# Altium PCB zigbee.PcbDoc
Units mm, origin at the board's own origin, x right, y up, seen from the top; angles counter-clockwise.
Board outline 29.84 x 46.23 mm, 2 copper layers (Top Layer, Bottom Layer); 60 components, 48 nets, 213 pads, 77 vias.
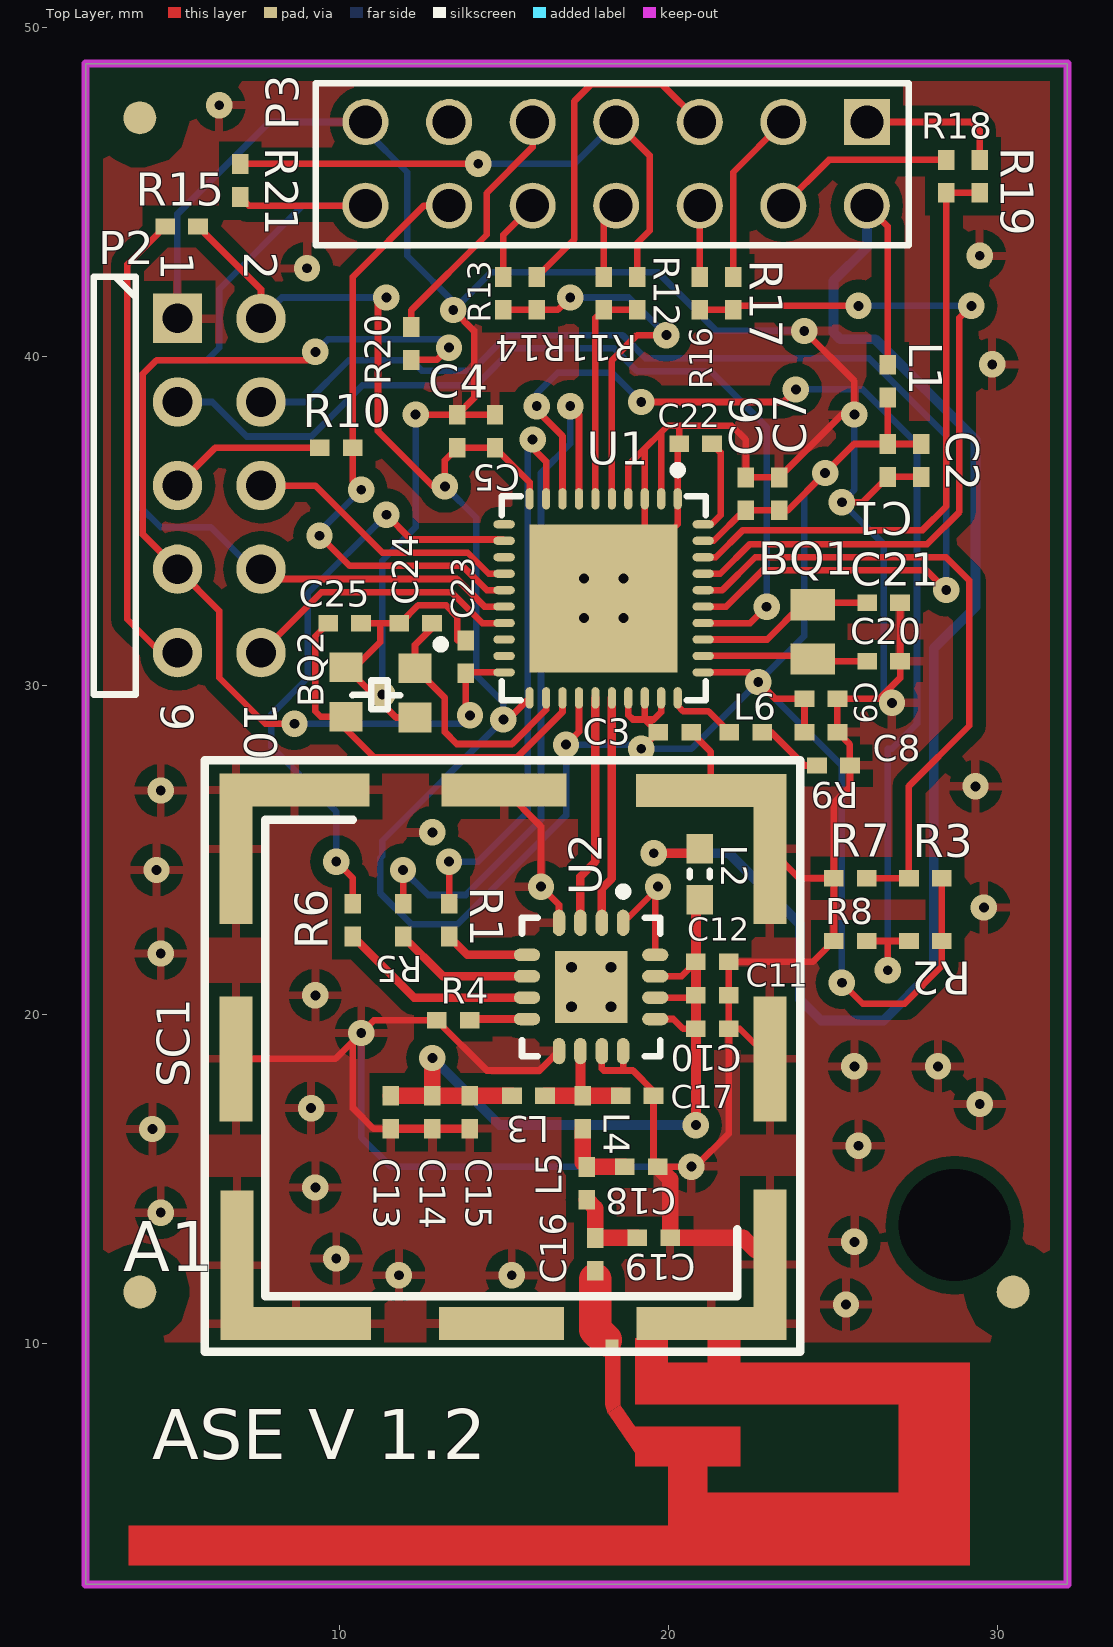
[diagram p0: Top Layer view]
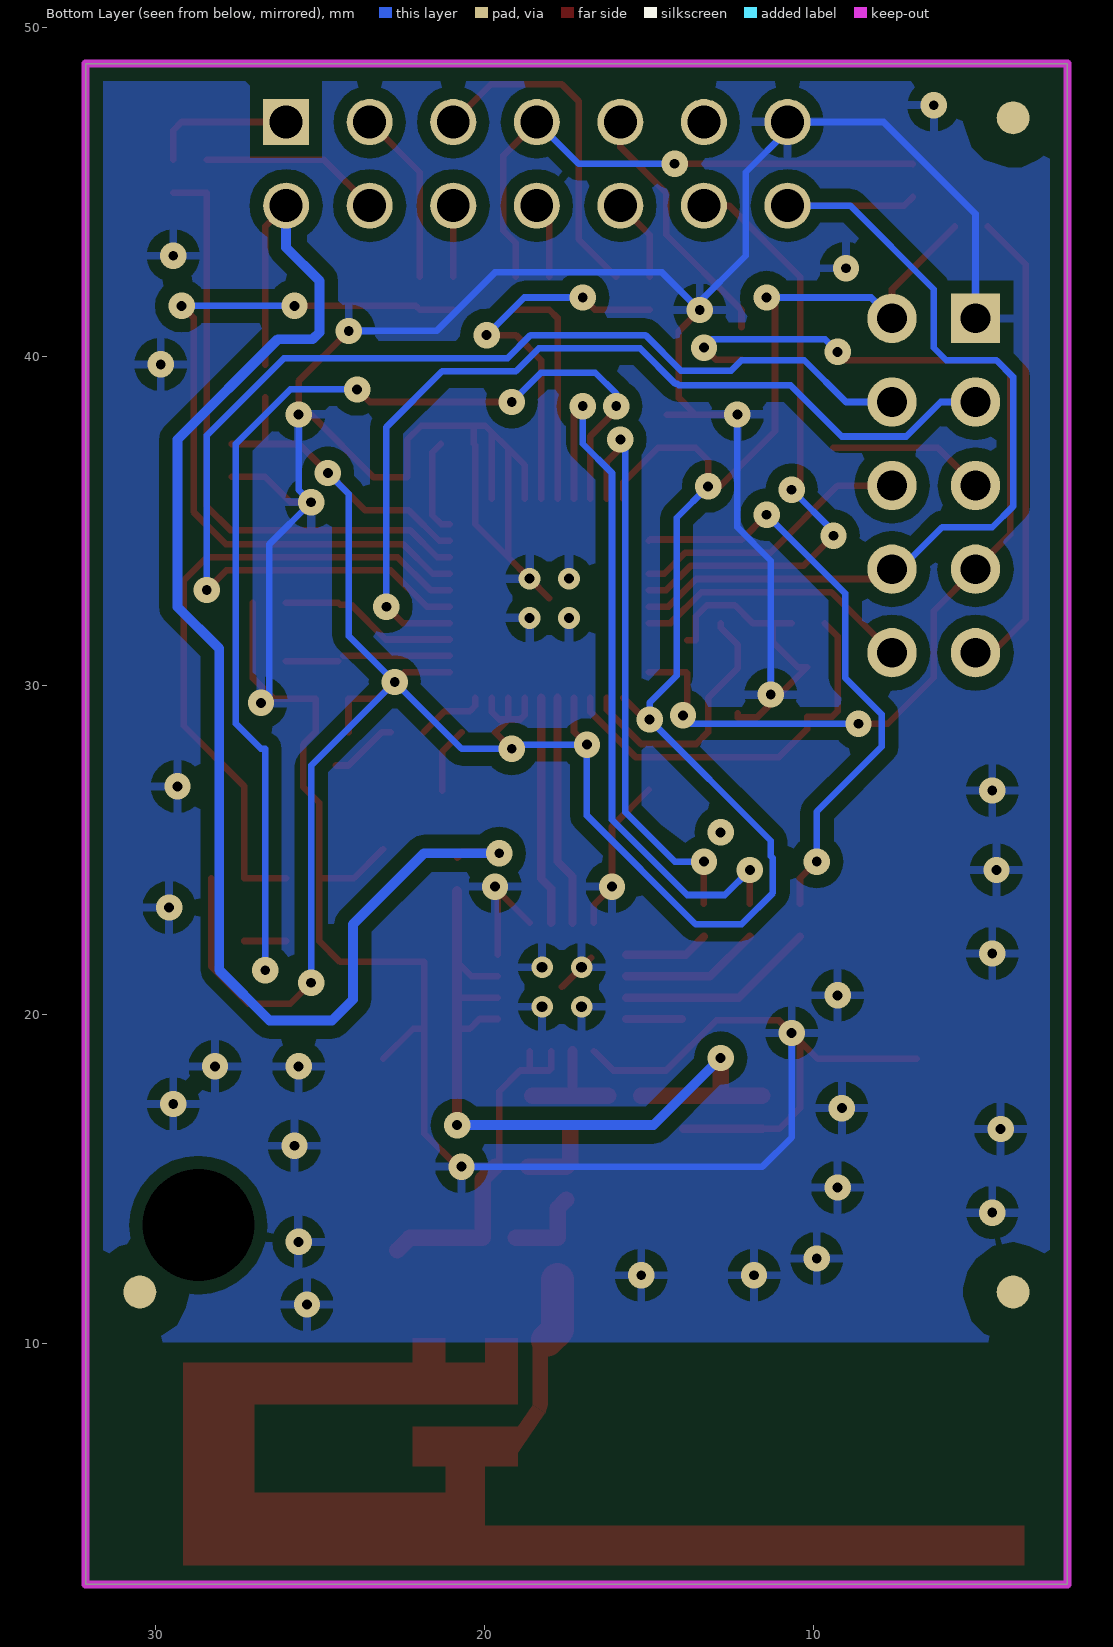
[diagram p1: Bottom Layer view, seen from below]

## Layer stack, top to bottom
Top Layer: signal copper 0.0356
Dielectric: dielectric 0.32, FR-4, Dk 4.8
Bottom Layer: signal copper 0.0356

## Board outline
2.286,2.667 32.131,2.667 32.131,48.895 2.286,48.895

## Design rules (kind name [scope] priority, off if disabled: settings)
Clearance Clearance_1 [InPolygon] p1: gap=0.4
Clearance [All] p2: gap=0.2
PolygonConnect [All] p1: connectstyle=Relief reliefconductorwidth=0.254 reliefentries=4 polygonreliefangle="90 Angle"
RoutingVias [All] p1: holewidth=0.711 width=1.27 viastyle="Through Hole" minholewidth=0.711 minwidth=1.27 maxholewidth=0.711 maxwidth=1.27
SilkscreenOverComponentPads [All] p1: minsilkscreentomaskgap=0.254
SolderMaskExpansion [All] p1: expansion=0
Width [All] p1: maxlimit=0.5 minlimit=0.15 preferedwidth=0.254
27 further rules are at their usual default settings.

## Components (designator, comment, footprint, x,y, rotation, side; value= is the part's Value field where it differs from the comment)
A1 "ANT" "F ant" 18.542,10.16 r180 top
BQ1 "Crystal" FC-12M 24.384,31.623 r90 top
BQ2 "Crystal" 403C11A32M00000 11.176,29.718 r180 top
C1 "Capacitor" 0402 26.67,36.83 r270 top
C2 "Capacitor" 0402 27.686,36.83 r270 top
C3 "Capacitor" 0402 20.193,28.575 r0 top
C4 "Capacitor" 0402 13.589,37.719 r90 top
C5 "Capacitor" 0402 14.732,37.719 r90 top
C6 "Capacitor" 0402 22.352,35.814 r90 top
C7 "Capacitor" 0402 23.368,35.814 r90 top
C8 "Capacitor" 0402 24.638,28.575 r0 top
C9 "Capacitor" 0402 24.638,29.591 r0 top
C10 "Capacitor" 0402 21.336,19.558 r0 top
C11 "Capacitor" 0402 21.336,20.574 r180 top
C12 "Capacitor" 0402 21.336,21.59 r180 top
C13 "Capacitor" 0402 11.557,17.018 r90 top
C14 "Capacitor" 0402 12.827,17.018 r90 top
C15 "Capacitor" 0402 13.97,17.018 r90 top
C16 "Capacitor" 0402 17.78,12.7 r270 top
C17 "Capacitor" 0402 19.05,17.526 r180 top
C18 "Capacitor" 0402 19.177,15.367 r180 top
C19 "Capacitor" 0402 19.558,13.208 r180 top
C20 "Capacitor" 0402 26.543,30.734 r180 top
C21 "Capacitor" 0402 26.543,32.512 r180 top
C22 "Capacitor" 0402 20.828,37.338 r180 top
C23 "Capacitor" 0402 13.843,30.861 r90 top
C24 "Capacitor" 0402 12.319,31.877 r0 top
C25 "Capacitor" 0402 10.16,31.877 r180 top
L1 "Inductor" 0402 26.67,39.243 r270 top
L2 "Inductor" 0603 20.955,24.257 r270 top
L3 "Inductor" 0402 15.748,17.526 r180 top
L4 "Inductor" 0402 17.399,17.018 r270 top
L5 "Inductor" 0402 17.526,14.859 r270 top
L6 "Inductor" 0402 22.352,28.575 r180 top
P2 "*" HDR2X5H 5.08,41.148 r270 top
P3 "Header 7X2" DIP14 26.035,47.117 r270 top
R1 "Resistor" 0402 13.335,22.86 r270 top
R2 "Resistor" 0402 27.813,22.225 r180 top
R3 "Resistor" 0402 27.813,24.13 r180 top
R4 "Resistor" 0402 13.462,19.812 r0 top
R5 "Resistor" 0402 11.938,22.86 r270 top
R6 "Resistor" 0402 10.414,22.86 r270 top
R7 "Resistor" 0402 25.527,24.13 r180 top
R8 "Resistor" 0402 25.527,22.225 r180 top
R9 "Resistor" 0402 25.019,27.559 r0 top
R10 "Blob" 0402 9.906,37.211 r0 top
R11 "Blob" 0402 18.034,41.91 r90 top
R12 "Blob" 0402 19.05,41.91 r270 top
R13 "Blob" 0402 14.986,41.91 r90 top
R14 "Blob" 0402 16.002,41.91 r270 top
R15 "Blob" 0402 5.207,43.942 r0 top
R16 "Blob" 0402 20.955,41.91 r90 top
R17 "Blob" 0402 21.971,41.91 r270 top
R18 "Blob" 0402 28.448,45.466 r90 top
R19 "Blob" 0402 29.464,45.466 r270 top
R20 "Resistor" 0402 12.192,40.386 r90 top
R21 "Blob" 0402 6.985,45.339 r270 top
SC1 "BMI-S-202-F" BMIS_202_F 14.986,18.669 r0 top
U1 "CC2530F256" QFN40 18.034,32.639 r270 top
U2 "CC2592" QFN16 17.653,20.828 r270 top

## Footprints (in the part's own frame and the unit in brackets; to place one, negate y for a bottom-side part, rotate by r counter-clockwise, add the part's x,y. Pads: shape width x height; smd on the part's side, far side on the other; paste and mask are expansions set on the pad)
0402 [mm] "Chip Capacitor, Body 1.0x0.5mm, IPC High Density"
  rect 0.6x0.5 smd: 1(-0.5,0) 2(0.5,0)
  body extent -0.55,-0.3 0.55,0.3, height 1.3
403C11A32M00000 [mm] "CRYSTAL 32MHZ 10PF SMD"
  rect 1x0.9 smd: 1(-1.125,-0.8) 2(0.975,-0.825) 3(0.975,0.675) 4(-1.125,0.7)
  silkscreen extent -2.03,-1.65 0.77,0.45, body extent -1.7,-1.22 1.53,1.15, height 0.85
0603 [mm] "0603, 2-Leads, Body 1,6x0,8mm, IPC High Density"
  rect 0.9x0.8 smd: 1(-0.775,0) 2(0.775,0)
  silkscreen extent -0.1,-0.3 0.1,0.3, body extent -0.8,-0.4 0.8,0.4, height 0.5
BMIS_202_F [mm] "BOARD SHIELD .65X.65\" FRAME"
  rect 1x4.55 smd: 1(-8.125,6.35) 3(8.1,6.35) 5(8.1,-6.275) 7(-8.1,-6.3)
  rect 4.55x1 smd: 1(-6.35,8.15) 3(6.3,8.125) 5(6.325,-8.075) 7(-6.3,-8.075)
  rect 3.8x1 smd: 2(0.025,8.15) 6(-0.05,-8.075)
  rect 1x3.8 smd: 4(8.1,-0.025) 8(-8.125,-0.025)
  silkscreen extent -9.08,-8.93 9.03,9.05, body extent -8.25,-8.25 8.25,8.25, height 3.8
DIP14 [mm]
  rect 1.4x1.4 hole 1: 1(0,0)
  round 1.4 hole 1: 2(2.54,0) 3(0,-2.54) 4(2.54,-2.54) 5(0,-5.08) 6(2.54,-5.08) 7(0,-7.62) 8(2.54,-7.62) 9(0,-10.16) 10(2.54,-10.16) 11(0,-12.7) 12(2.54,-12.7) 13(0,-15.24) 14(2.54,-15.24)
  silkscreen extent -1.17,-16.75 3.75,1.27, body extent -0.74,-16.35 3.25,1, height 8.64
"F ant" [mm] "F antenna 2.4Ghz"
  rect 0.4x0.4 smd paste+0: 1(0.254,0.254)
  rect 3x0.01 smd: 2(-2.032,0)
  Top Layer region: 0,2.03 0.379,2.291 -0.577,3.681 -0.956,3.421
  Top Layer region: 0,0 0.46,0 0.46,2.03 0,2.03
  Top Layer region: -3.65,0.74 -0.45,0.74 -0.45,2.03 -3.65,2.03
  Top Layer region: -3.65,2.69 -0.45,2.69 -0.45,3.9 -3.65,3.9
  Top Layer region: -10.63,0.74 -8.45,0.74 -8.45,4.7 -10.63,4.7
  Top Layer region: -10.63,5.7 14.95,5.7 14.95,6.91 -10.63,6.91
  Top Layer region: -10.63,4.7 -1.45,4.7 -1.45,5.7 -10.63,5.7
  Top Layer region: -8.45,0.74 -3.575,0.74 -3.575,2.03 -8.45,2.03
  Top Layer region: -2.65,3.9 -1.45,3.9 -1.45,4.7 -2.65,4.7
  Top Layer region: -1.45,0 -0.45,0 -0.45,0.74 -1.45,0.74
  Top Layer region: -3.65,0 -2.65,0 -2.65,0.74 -3.65,0.74
  Top Layer region: 0,2.03 0.46,2.03 0.379,2.291
FC-12M [mm]
  rect 0.95x1.35 smd: 1(-0.825,0) 2(0.825,0)
  body extent -1.02,-0.6 1.02,0.6, height 0.6
HDR2X5H [mm] "Connector; Header; 5x2 Position; Right Angle"
  rect 1.5x1.5 hole 0.9: 1(0,0)
  round 1.5 hole 0.9: 2(0,2.54) 3(2.54,0) 4(2.54,2.54) 5(5.08,0) 6(5.08,2.54) 7(7.62,0) 8(7.62,2.54) 9(10.16,0) 10(10.16,2.54)
  silkscreen extent -1.27,-2.54 11.43,-1.27
QFN16 [mm]
  oval 0.8x0.38 smd: 1(-1.95,0.975) 2(-1.95,0.325) 3(-1.95,-0.325) 4(-1.95,-0.975) 9(1.95,-0.975) 10(1.95,-0.325) 11(1.95,0.325) 12(1.95,0.975)
  oval 0.38x0.8 smd: 5(-0.975,-1.95) 6(-0.325,-1.95) 7(0.325,-1.95) 8(0.975,-1.95) 13(0.975,1.95) 14(0.325,1.95) 15(-0.325,1.95) 16(-0.975,1.95)
  rect 2.2x2.2 smd: 17(0,0)
  silkscreen extent -3.02,-2.1 2.1,2.1, body extent -2.08,-2.07 2.07,2.08, height 0.8
QFN40 [mm]
  oval 0.65x0.25 smd: 1(-3.025,2.25) 2(-3.025,1.75) 3(-3.025,1.25) 4(-3.025,0.75) 5(-3.025,0.25) 6(-3.025,-0.25) 7(-3.025,-0.75) 8(-3.025,-1.25) 9(-3.025,-1.75) 10(-3.025,-2.25) 21(3.025,-2.25) 22(3.025,-1.75) 23(3.025,-1.25) 24(3.025,-0.75) 25(3.025,-0.25) 26(3.025,0.25) 27(3.025,0.75) 28(3.025,1.25) 29(3.025,1.75) 30(3.025,2.25)
  oval 0.25x0.65 smd: 11(-2.25,-3.025) 12(-1.75,-3.025) 13(-1.25,-3.025) 14(-0.75,-3.025) 15(-0.25,-3.025) 16(0.25,-3.025) 17(0.75,-3.025) 18(1.25,-3.025) 19(1.75,-3.025) 20(2.25,-3.025) 31(2.25,3.025) 32(1.75,3.025) 33(1.25,3.025) 34(0.75,3.025) 35(0.25,3.025) 36(-0.25,3.025) 37(-0.75,3.025) 38(-1.25,3.025) 39(-1.75,3.025) 40(-2.25,3.025)
  rect 4.5x4.5 smd: 41(0,0)
  silkscreen extent -4.02,-3.1 3.1,3.1, body extent -3.08,-3.08 3.08,3.08, height 1

## Part data
A1: "Inverted-F Antenna"
BQ1: library part 6LC:308C, "CRYSTAL 32.768KHZ 12.5PF SMD"
BQ2: library part HC-49SMD, "CRYSTAL 32MHZ 10PF SMD"
C1 C10: library part Cap, "CAP CER 2.2UF 6.3V 20% X5R 0402"
C2 C13 C22: library part Cap, "CAP CER 1UF 6.3V 10% X5R 0402"
C3 C4 C5 C6 C7 C8 C9 C23: library part Cap, "CAP CER 0.1UF 10V 20% X5R 0402"
C11 C14: library part Cap, "CAP CER 10000PF 10V 10% X5R 0402"
C12 C15: library part Cap, "CAP CER 12PF 50V 5% NP0 0402"
C16: library part Cap, "CAP CER 18PF 50V 5% NP0 0402"
C17 C18: library part Cap, "CAP CER 2.2PF 50V NP0 0402"
C19: library part Cap, "CAP CER 0.2PF 50V NP0 0402"
C20 C21: library part Cap, "CAP CER 22PF 50V 5% NP0 0402"
C24 C25: library part Cap, "CAP CER 15PF 50V 5% NP0 0402"
L1: "FILTER CHIP 1000 OHM 250MA 0402"
L2: "FILTER CHIP 1000 OHM 250MA 0603"
L3: "INDUCTOR 4.7NH 300MA 0402"
L4: "INDUCTOR 1.0NH 300MA 0402"
L5: "INDUCTOR 2.0NH 300MA 0402"
L6: "INDUCTOR 6.8NH 300MA 0402"
P2: library part "Header 5X2", "CONN HEADER R/A DUAL 10POS GOLD"
P3: "BERGSTIK II .100\" DR STRAIGHT"
R1 R2 R3 R5 R6 R7 R8: library part Res3, "RES 10K OHM 1/10W 5% 0402 SMD"
R4: library part Res3, "RES 3.9K OHM 1/10W 1% 0402 SMD"
R9: library part Res3, "RES 56K OHM 1/10W 1% 0402 SMD"
R10 R11 R12 R13 R14 R15 R16 R17 R18 R19 R21: library part Res3, "RES 0.0 OHM 1/10W JUMP 0402 SMD"
R20: library part Res3, "RES 2.7K OHM 1/10W 5% 0402 SMD"
SC1: "BOARD SHIELD .65X.65\" FRAME"
U1: "IC SOC IEEE 802.15.4/ZIG 40VQFN"
U2: "IC RF FRONT END 2.4GHZ 16-VQFN"

## Free pads (board coordinates)
  round 1 smd mask+1: 1(3.937,11.557) 1(3.937,47.244) 1(30.48,11.557)
  round 1 smd far side mask+1: 1(3.937,11.557) 1(3.937,47.244) 1(30.48,11.557)
  round 1.524 hole 3.4: 12(28.702,13.589)

## Via types
v1: diameter 0.8, hole 0.3, Top Layer to Bottom Layer, 69 vias
v2: diameter 0.66, hole 0.33, Top Layer to Bottom Layer, tented top, 4 vias
v3: diameter 0.66, hole 0.3, Top Layer to Bottom Layer, tented top, 4 vias

## Nets (pads, with @x,y where several pads share a name; then routed paths per layer and width w, separated by ;. In a path a pad name is that pad's centre, name@x,y a point inside that pad or via, vN(x,y) a via of type N, cw(c..) or ccw(c..) an arc to the next point about the centre after c; other vN are vias at no path point)
CC2530_CLK: P2.6 U1.14 | length 8.5
  Top Layer w0.2: P2.6 9.271,36.068 11.312,34.027 13.906,34.027 14.544,33.389 U1.14
CC2530_DC: P2.3 U1.34 | length 28
  Top Layer w0.2: U1.34 22.491,31.889 v1(22.987,32.385)
  Bottom Layer w0.2: P2.3 6.135,38.608 7.185,37.558 9.144,37.558 10.702,39.116 14.097,39.116 14.14,39.159 14.198,39.159 15.279,40.24 18.35,40.24 19.05,39.54 21.293,39.54 22.987,37.846 v1(22.987,32.385)
CC2530_DD: P2.4 U1.35 | length 36
  Top Layer w0.2: U1.35 21.759,32.389 22.86,33.49 27.851,33.49 v1(28.448,32.893)
  Bottom Layer w0.2: P2.4 9.017,38.608 10.287,39.878 12.192,39.878 12.511,39.559 14.032,39.559 15.113,40.64 18.604,40.64 19.304,39.94 26.1,39.94 28.448,37.592 v1(28.448,32.893)
CC2530_MISO: P2.10 U1.17 | length 8.5
  Top Layer w0.2: P2.10 9.459,32.827 13.409,32.827 14.347,31.889 U1.17
CC2530_MOSI: P2.8 P3.14 R21.2 U1.16 | length 30.2
  Top Layer w0.2: R21.2 7.247,44.577 P3.14 ; P2.8 7.921,33.227 13.575,33.227 14.413,32.389 U1.16
  Bottom Layer w0.2: P2.8 7.366,33.528 6.096,34.798 4.572,34.798 3.937,35.433 3.937,39.37 4.445,39.878 5.969,39.878 6.35,40.259 6.35,42.037 8.89,44.577 P3.14
CC2530_RESET: C23.1 P2.7 R20.1 U1.20 | length 32.1
  Top Layer w0.2: v1(8.636,28.829) 7.747,28.829 6.35,30.226 6.35,32.258 P2.7 4.03,34.578 4.03,39.463 4.445,39.878 9.017,39.878 v1(9.271,40.132) ; R20.1 12.962,39.886 v1(13.335,40.259) ; C23.1 13.843,29.21 v1(13.97,29.083) ; C23.1@13.871,30.389 U1.20
  Bottom Layer w0.2: v1(8.636,28.829) 13.716,28.829 v1(13.97,29.083) ; v1(9.271,40.132) 9.652,40.513 13.081,40.513 v1(13.335,40.259)
CC2530_SS: P3.12 R10.2 U1.15 | length 18.6
  Top Layer w0.2: v1(9.398,34.544) 10.315,33.627 13.74,33.627 14.478,32.889 U1.15 ; v1(10.668,35.941) 10.406,36.203 R10.2 10.406,42.41 12.573,44.577 P3.12
  Bottom Layer w0.2: v1(9.398,34.544) 9.398,34.671 v1(10.668,35.941)
CFG0: R2.2 R8.1 U1.8 | length 34.9
  Top Layer w0.2: v1@16.129,38.227 16.784,37.572 U1.8 ; v1(19.177,38.608) 23.495,38.608 v1(23.876,38.989) ; R8.1 26.67,22.225 ; v1(26.67,21.336) 26.67,22.225 ; R2.2 26.67,22.225
  Bottom Layer w0.2: v1(16.002,38.481) 16.002,38.862 16.637,39.497 18.288,39.497 v1(19.177,38.608) ; v1(23.876,38.989) 25.908,38.989 27.559,37.338 27.559,28.829 26.797,28.067 26.67,28.067 v1(26.67,21.336)
CFG1: R3.2 R7.1 U1.36 | length 19.9
  Top Layer w0.2: U1.36 21.644,32.889 22.645,33.89 28.441,33.89 29.148,33.183 29.148,28.767 27.313,26.932 R3.2 R7.1
CTS: P3.8 R11.2 | length 2.3
  Top Layer w0.2: R11.2 18.034,44.196 P3.8
GND: A1.2 BQ2.2 BQ2.4 C1.2 C2.2 C3.2 C4.2 C5.2 C6.2 C7.2 C8.2 C9.2 C10.2 C11.1 C12.1 C13.1 C14.1 C15.1 C17.1 C18.1 C19.1 C20.1 C21.1 C22.2 C23.2 C24.1 C25.1 P2.1 P3.13 R4.1 R7.2 R8.2 R9.2 SC1.1 SC1.2 SC1.3 SC1.4 SC1.5 SC1.6 SC1.7 SC1.8 U1.1 U1.2 U1.3 U1.4 U1.41 U2.1 U2.4 U2.9 U2.11 U2.12 U2.16 U2.17 | length 172
  Top Layer w0.2: SC1.8 9.881,18.644 v1@10.414,19.177 ; C25.1 11.239,31.877 ; C13.1 11.041,16.518 10.414,17.145 v1@10.414,19.177 ; BQ2.4@12.301,29.144 BQ2.4 11.726,29.018 BQ2.2 10.477,30.543 11.239,31.305 11.239,31.877 ; v1(12.319,38.227) 12.065,38.227 12.073,38.219 C4.2 ; v1(13.462,41.402) 14.097,40.767 14.097,38.727 C4.2 ; C23.2 13.581,31.361 13.581,32.089 13.243,32.427 12.395,32.427 11.845,31.877 C24.1 11.239,31.877 ; 14.47,38.219 C4.2 ; SC1.2 16.129,25.701 v1(16.129,23.876) 16.678,23.327 U2.4 ; U2.9 16.088,18.288 14.486,18.288 R4.1 11.049,19.812 v1(10.668,19.431) v1@10.414,19.177 ; U2.17@16.764,21.717 U2.17 ; U2.11 17.978,18.344 18.034,18.288 18.923,18.288 19.55,17.661 C17.1 19.55,15.494 C18.1 v1(20.701,15.367) 20.828,15.367 21.836,16.375 C10.2 ; 18.628,18.329 U2.12 ; U2.1 v1@19.603,23.753 ; U1.4 18.784,36.691 19.284,37.191 ; U2.16 v1@19.603,23.753 ; v1(19.685,23.876) 19.685,23.835 v1@19.603,23.753 ; U1.2 19.784,37.691 ; C22.2@20.284,37.294 U1.1 20.284,34.889 U1.41@19.284,33.889 ; C22.2 20.328,37.88 ; C3.2 21.286,27.982 SC1.3@21.286,26.794 ; SC1.4 22.172,19.558 C10.2 ; SC1.3@23.086,25.019 23.975,24.13 R7.2 ; v1(24.13,40.767) 25.654,39.243 v1(25.654,38.227) 25.281,38.227 C7.2 C6.2 22.352,37.465 21.929,37.888 19.981,37.888 19.784,37.691 ; v1(25.273,35.56) 25.9,35.56 C1.2 C2.2 ; C21.1 C20.1 27.043,30.218 26.416,29.591 C9.2 C8.2 25.519,28.194 R9.2 25.519,26.916 25.027,26.424 R7.2 ; U1.41@19.284,33.889 U1.3 19.284,37.191 ; U1.41@19.284,33.889 U1.41 v3(18.634,33.239) U1.41@19.284,33.889 ; 19.284,37.191 19.784,37.691 ; C10.2 C12.1 24.392,21.59 R8.2 R7.2
  Top Layer w0.254: C13.1 C14.1 C15.1
  Top Layer w0.5: C18.1 20.058,14.986 C19.1 22.272,13.208 SC1.5@22.653,12.827
  Bottom Layer w0.2: P2.1 5.08,44.323 7.874,47.117 P3.13 10.795,46.863 12.065,45.593 12.065,43.053 v1@13.589,41.529 ; v1(10.668,19.431) 10.668,16.256 11.557,15.367 v1(20.701,15.367) ; v1(11.303,29.718) 11.303,33.782 12.319,34.798 v1(12.319,38.227) ; v1(13.462,41.402) v1@13.589,41.529 ; v1(24.13,40.767) 21.463,40.767 19.685,42.545 14.605,42.545 v1@13.589,41.529 ; v1(25.654,38.227) 25.654,35.941 v1(25.273,35.56) 26.543,34.29 26.543,29.718 v1(26.797,29.464)
  other v1: 25.4,11.176 11.811,12.065 15.24,12.065 9.906,12.573 25.654,13.081 4.572,13.97 9.271,14.732 25.781,16.002 4.318,16.51 9.144,17.145 29.464,17.272 25.654,18.415 28.194,18.415 9.271,20.574 4.572,21.844 29.591,23.241 4.445,24.384 12.827,25.527 4.572,26.797 29.337,26.924 29.845,39.751 9.017,42.672 29.464,43.053 6.35,47.625
  other v2: 17.053,20.228 18.253,20.228 17.053,21.428 18.253,21.428
  other v3: 17.434,32.039 18.634,32.039 17.434,33.239
HGM: R6.1 U1.12 | length 18.2
  Top Layer w0.2: v1(9.906,24.638) 10.414,24.13 R6.1 ; v1(11.43,35.179) 12.182,34.427 14.971,34.427 U1.12
  Bottom Layer w0.2: v1(9.906,24.638) 9.906,26.159 7.936,28.129 7.936,29.119 9.043,30.226 9.043,32.792 v1(11.43,35.179)
LNA: R5.1 U1.7 | length 22.3
  Top Layer w0.2: R5.1 v1(11.938,24.384) ; v1(17.018,38.481) 17.284,38.215 U1.7
  Bottom Layer w0.2: v1(11.938,24.384) 12.7,23.622 13.843,23.622 16.129,25.908 16.129,36.449 17.018,37.338 v1(17.018,38.481)
MISO/RX: R16.1 R17.2 U1.37 | length 23.3
  Top Layer w0.2: R16.1 R17.2 22.09,41.529 v1(25.781,41.529) ; U1.37 21.578,33.389 22.479,34.29 27.871,34.29 28.848,35.267 28.848,41.167 v1(29.21,41.529)
  Bottom Layer w0.2: v1(25.781,41.529) v1(29.21,41.529)
MOSI/TX: R18.1 R19.2 U1.38 | length 18.6
  Top Layer w0.2: U1.38 21.443,33.889 22.268,34.714 27.729,34.714 28.448,35.433 R18.1 R19.2
NetA1_1: A1.1 C16.2 | length 2
  Top Layer w1: C16.2@17.78,11.938 17.78,10.414 A1.1@18.098,10.096
NetBQ1_1: BQ1.1 C20.2 U1.32 | length 4.8
  Top Layer w0.2: U1.32 BQ1.1@24.293,30.889 ; BQ1.1@24.448,30.734 C20.2
NetBQ1_2: BQ1.2 C21.2 U1.33 | length 5.4
  Top Layer w0.2: U1.33 23.007,31.389 24.066,32.448 BQ1.2 ; BQ1.2@24.448,32.512 C21.2
NetBQ2_1: BQ2.1 C24.2 U1.22 | length 7.9
  Top Layer w0.2: C24.2 12.819,31.742 12.301,31.224 BQ2.1 13.208,29.611 13.208,28.575 13.57,28.213 15.246,28.213 16.284,29.251 U1.22
NetBQ2_3: BQ2.3 C25.2 U1.23 | length 12.1
  Top Layer w0.2: C25.2 9.271,31.488 9.271,29.21 9.438,29.043 BQ2.3 10.201,28.661 11.049,27.813 15.411,27.813 16.784,29.186 U1.23
NetC16_1: C16.1 C19.2 L5.2 | length 2.5
  Top Layer w0.5: L5.2 17.78,14.105 C16.1 C19.2@19.05,13.2
NetC17_2: C17.2 L3.1 L4.1 U2.10 | length 3.7
  Top Layer w0.254: L4.1@17.328,17.589 L4.1@17.391,17.526
  Top Layer w0.3: L4.1@17.328,17.589 U2.10
  Top Layer w0.5: L3.1 L4.1@17.391,17.526 ; L4.1@17.407,17.526 C17.2
NetC18_2: C18.2 L4.2 L5.1 | length 2.4
  Top Layer w0.5: L4.2 17.399,15.486 L5.1 18.669,15.359 C18.2
NetC22_1: C22.1 U1.40 | length 2.9
  Top Layer w0.2: U1.40 21.312,34.889 21.59,35.167 21.59,37.076 C22.1
NetL6_1: L6.1 R9.1 | length 2.1
  Top Layer w0.2: L6.1 23.122,28.575 24.138,27.559 R9.1
NetL6_2: L6.2 U1.30 | length 2.1
  Top Layer w0.2: U1.30 20.284,29.373 20.447,29.21 21.217,29.21 L6.2
NetP2_5: P2.5 R10.1 | length 4.8
  Top Layer w0.2: P2.5 6.223,37.211 R10.1
NetP2_9: P2.9 R15.1 | length 14.4
  Top Layer w0.2: R15.1 3.556,42.791 3.556,32.004 4.572,30.988 P2.9
NetP3_9: P3.9 R20.2 | length 7.8
  Top Layer w0.2: R20.2 12.192,41.402 14.478,43.688 14.478,44.958 15.875,46.355 P3.9
NetR1_2: R1.2 U2.5 | length 2.6
  Top Layer w0.254: R1.2 13.892,21.803 U2.5
NetR4_2: R4.2 U2.8 | length 1.7
  Top Layer w0.254: R4.2@14.003,19.853 U2.8
NetR5_2: R5.2 U2.6 | length 4.3
  Top Layer w0.254: R5.2 13.145,21.153 U2.6
NetR6_2: R6.2 U2.7 | length 6.1
  Top Layer w0.254: R6.2 12.271,20.503 U2.7
NetU1_25: U1.25 U2.3 | length 7
  Top Layer w0.254: U2.3 17.328,24.186 17.784,24.642 U1.25
NetU1_26: U1.26 U2.2 | length 7
  Top Layer w0.254: U2.2 17.978,23.82 18.284,24.126 U1.26
PA: R1.1 U1.9 | length 17.4
  Top Layer w0.2: R1.1 v1(13.335,24.638) ; v1@15.875,37.211 16.284,36.802 U1.9
  Bottom Layer w0.2: v1(13.335,24.638) 14.224,24.638 15.729,26.143 15.729,37.319 v1(15.875,37.465)
RTS: P3.10 R13.2 | length 2.5
  Top Layer w0.2: R13.2 14.986,43.688 P3.10
RX: P3.6 R16.2 | length 2.2
  Top Layer w0.2: R16.2 P3.6
SCLK/RT: R13.1 R14.2 U1.5 | length 11.8
  Top Layer w0.2: R13.1 R14.2 16.645,41.41 v1(17.018,41.783) ; U1.5 18.284,39.874 19.05,40.64 v1(19.939,40.64)
  Bottom Layer w0.2: v1(17.018,41.783) 18.796,41.783 v1(19.939,40.64)
SPI_MISO: P3.3 R17.1 | length 5.3
  Top Layer w0.2: R17.1 21.971,45.593 P3.3
SPI_MOSI: P3.1 R19.1 | length 4.4
  Top Layer w0.2: P3.1 29.21,47.117 29.464,46.863 R19.1
SPI_SCK: P3.5 R14.1 | length 10.3
  Top Layer w0.2: R14.1 17.145,43.553 17.145,47.752 17.653,48.26 19.812,48.26 P3.5
SS/CT: R11.1 R12.2 U1.6 | length 6.9
  Top Layer w0.2: U1.6 17.784,41.16 R11.1 R12.2
TX: P3.4 R18.2 | length 5.5
  Top Layer w0.2: P3.4 24.884,45.966 R18.2
VCC: L1.1 L2.1 P3.2 | length 45.6
  Top Layer w0.2: L2.1@20.693,24.892 L2.1@20.828,24.757 ; P3.2 26.67,43.942 L1.1
  Top Layer w0.3: v1(19.558,24.892) L2.1@20.693,24.892
  Bottom Layer w0.3: v1(19.558,24.892) 21.844,24.892 24.003,22.733 24.003,20.447 24.638,19.812 26.543,19.812 28.067,21.336 28.067,31.112 29.337,32.382 29.337,37.465 26.289,40.513 25.227,40.513 25.019,40.721 25.019,42.291 26.035,43.307 P3.2
VCC_CC2530: C1.1 C2.1 C3.1 C4.1 C5.1 C6.1 C7.1 C8.1 C9.1 L1.2 P2.2 R2.1 R3.1 R15.2 U1.10 U1.21 U1.24 U1.27 U1.28 U1.29 U1.31 U1.39 | length 94.4
  Top Layer w0.2: R15.2 7.62,42.029 P2.2 ; v1@11.176,41.783 11.176,37.719 12.853,36.042 v1(13.208,36.042) 13.208,36.838 C4.1 C5.1 15.784,36.167 U1.10 ; v1(14.986,28.956) 15.126,28.956 U1.21 ; v1@16.891,27.94 v1(16.891,28.194) 17.284,28.587 U1.24 ; U1.27 18.784,29.095 18.923,28.956 19.284,28.956 ; v1(19.177,28.067) 19.185,28.067 C3.1 19.665,28.575 19.284,28.956 ; U1.28 19.284,28.956 ; U1.29 19.784,29.182 19.558,28.956 19.284,28.956 ; U1.31 22.443,30.389 v1(22.733,30.099) 23.241,29.591 C9.1 C8.1 ; U1.39 21.377,34.389 22.302,35.314 C6.1 C7.1 23.63,35.314 v1(24.765,36.449) 25.646,37.33 C1.1 ; v1(25.273,20.955) 25.908,20.32 27.178,20.32 28.313,21.455 R2.1 R3.1 ; L1.2 C1.1 ; C2.1 C1.1
  Bottom Layer w0.2: P2.2 8.255,41.783 v1(11.43,41.783) ; v1(13.208,36.042) 14.162,35.088 14.162,30.291 14.986,29.467 v1(14.986,28.956) 11.303,25.273 11.303,24.804 11.238,24.739 11.238,23.687 12.192,22.733 13.589,22.733 16.891,26.035 v1(16.891,28.194) 19.05,28.194 v1(19.177,28.067) 20.701,28.067 v1(22.733,30.099) ; v1(24.765,36.449) 24.13,35.814 24.13,31.496 v1(22.733,30.099) ; v1(25.273,20.955) 25.273,27.559 v1(22.733,30.099)
VCC_CC2592: C10.1 C11.2 C12.2 C13.2 C14.2 C15.2 L2.2 L3.2 U2.13 U2.14 U2.15 | length 24.7
  Top Layer w0.2: C14.2 C14.2@12.827,17.526 ; U2.13 20.152,19.853 20.447,19.558 C10.1 ; U2.14 C11.2@20.765,20.503 ; U2.15 20.399,21.153 C12.2
  Top Layer w0.3: v1(20.836,16.629) C10.1 C12.2 L2.2@20.836,23.749
  Top Layer w0.5: C13.2@11.565,17.526 C14.2@12.827,17.526 ; v1(12.827,18.669) C14.2@12.827,17.526 ; L3.2 C14.2@12.827,17.526
  Bottom Layer w0.3: v1(12.827,18.669) 14.867,16.629 v1(20.836,16.629)
ZIGBEE_CS: P3.7 R12.1 R21.1 | length 17.2
  Top Layer w0.2: R21.1 6.993,45.847 v1(14.224,45.847) ; P3.7 19.431,46.101 19.431,43.815 19.05,43.434 R12.1
  Bottom Layer w0.2: v1(14.224,45.847) 17.145,45.847 P3.7
pads on no net: P3.11 U1.11 U1.13 U1.18 U1.19

## Polygon pours and split planes (outlines as drawn)
GND on Bottom Layer "GND_POLYGON_BOTTOM" (solid, pour order 2): 2.413,48.895 32.004,48.895 32.004,4.445 2.413,4.445
GND on Top Layer "GND_POLYGON_BOTTOM" (solid, pour order 4): 2.413,48.895 32.004,48.895 32.004,4.445 2.413,4.445

## Keep-outs
Keep-Out Layer:
  the board outline again, w0.254

## Other copper
Top Layer:
  rectangle: 20.066,4.191 29.083,4.699
  pour cut-out: 28.956,11.557 29.083,11.049 29.337,10.541 29.718,10.287 30.226,10.033 30.607,10.033 31.369,10.287 31.75,10.668 32.004,11.43 32.004,11.684 31.877,12.192 31.623,12.573 31.115,12.954 30.48,13.081 29.972,12.954 29.464,12.7 29.083,12.192
  pour cut-out: 2.413,11.557 2.54,11.049 2.794,10.541 3.175,10.287 3.683,10.033 4.064,10.033 4.826,10.287 5.207,10.668 5.461,11.43 5.461,11.684 5.334,12.192 5.08,12.573 4.572,12.954 3.937,13.081 3.429,12.954 2.921,12.7 2.54,12.192
  pour cut-out: 2.413,47.244 2.54,46.736 2.794,46.228 3.175,45.974 3.683,45.72 4.064,45.72 4.826,45.974 5.207,46.355 5.461,47.117 5.461,47.371 5.334,47.879 5.08,48.26 4.572,48.641 3.937,48.768 3.429,48.641 2.921,48.387 2.54,47.879
  pour cut-out: 32.131,2.667 2.286,2.667 2.286,10.033 32.131,10.033
Bottom Layer:
  pour cut-out: 2.413,11.557 2.54,11.049 2.794,10.541 3.175,10.287 3.683,10.033 4.064,10.033 4.826,10.287 5.207,10.668 5.461,11.43 5.461,11.684 5.334,12.192 5.08,12.573 4.572,12.954 3.937,13.081 3.429,12.954 2.921,12.7 2.54,12.192
  pour cut-out: 28.956,11.557 29.083,11.049 29.337,10.541 29.718,10.287 30.226,10.033 30.607,10.033 31.369,10.287 31.75,10.668 32.004,11.43 32.004,11.684 31.877,12.192 31.623,12.573 31.115,12.954 30.48,13.081 29.972,12.954 29.464,12.7 29.083,12.192
  pour cut-out: 2.413,47.244 2.54,46.736 2.794,46.228 3.175,45.974 3.683,45.72 4.064,45.72 4.826,45.974 5.207,46.355 5.461,47.117 5.461,47.371 5.334,47.879 5.08,48.26 4.572,48.641 3.937,48.768 3.429,48.641 2.921,48.387 2.54,47.879
  pour cut-out: 32.131,2.667 2.286,2.667 2.286,10.033 32.131,10.033

## Silkscreen, mask and mechanical layers (free items; w line width, h text height)
Top Overlay:
  lines w0.254: 5.911,25.908 5.911,27.719 8.128,27.719 ; 10.414,25.908 7.747,25.908 7.747,24.003 7.747,11.43 19.939,11.43 22.098,11.43 22.098,13.462 ; 22.225,9.744 24.011,9.744 24.011,11.557
  text "ASE V 1.2" at 4.318,6.477 h1.52
Mechanical 1:
  lines w0.254: 26.035,4.445 26.035,44.577

## Text inside footprints (layer, text, board x,y; h text height)
P2: Top Overlay "2" at 7.112,43.18 h1 r270; Top Overlay "1" at 4.572,43.18 h1 r270; Top Overlay "9" at 4.572,29.464 h1 r270; Top Overlay "10" at 7.112,29.464 h1 r270